# Altium PCB PCB.PcbDoc
Units mm, origin at the board's own origin, x right, y up, seen from the top; angles counter-clockwise.
Board outline 152.4 x 101.6 mm, 2 copper layers (Top Layer, Bottom Layer); 11 components, 16 nets, 60 pads, 3 vias.
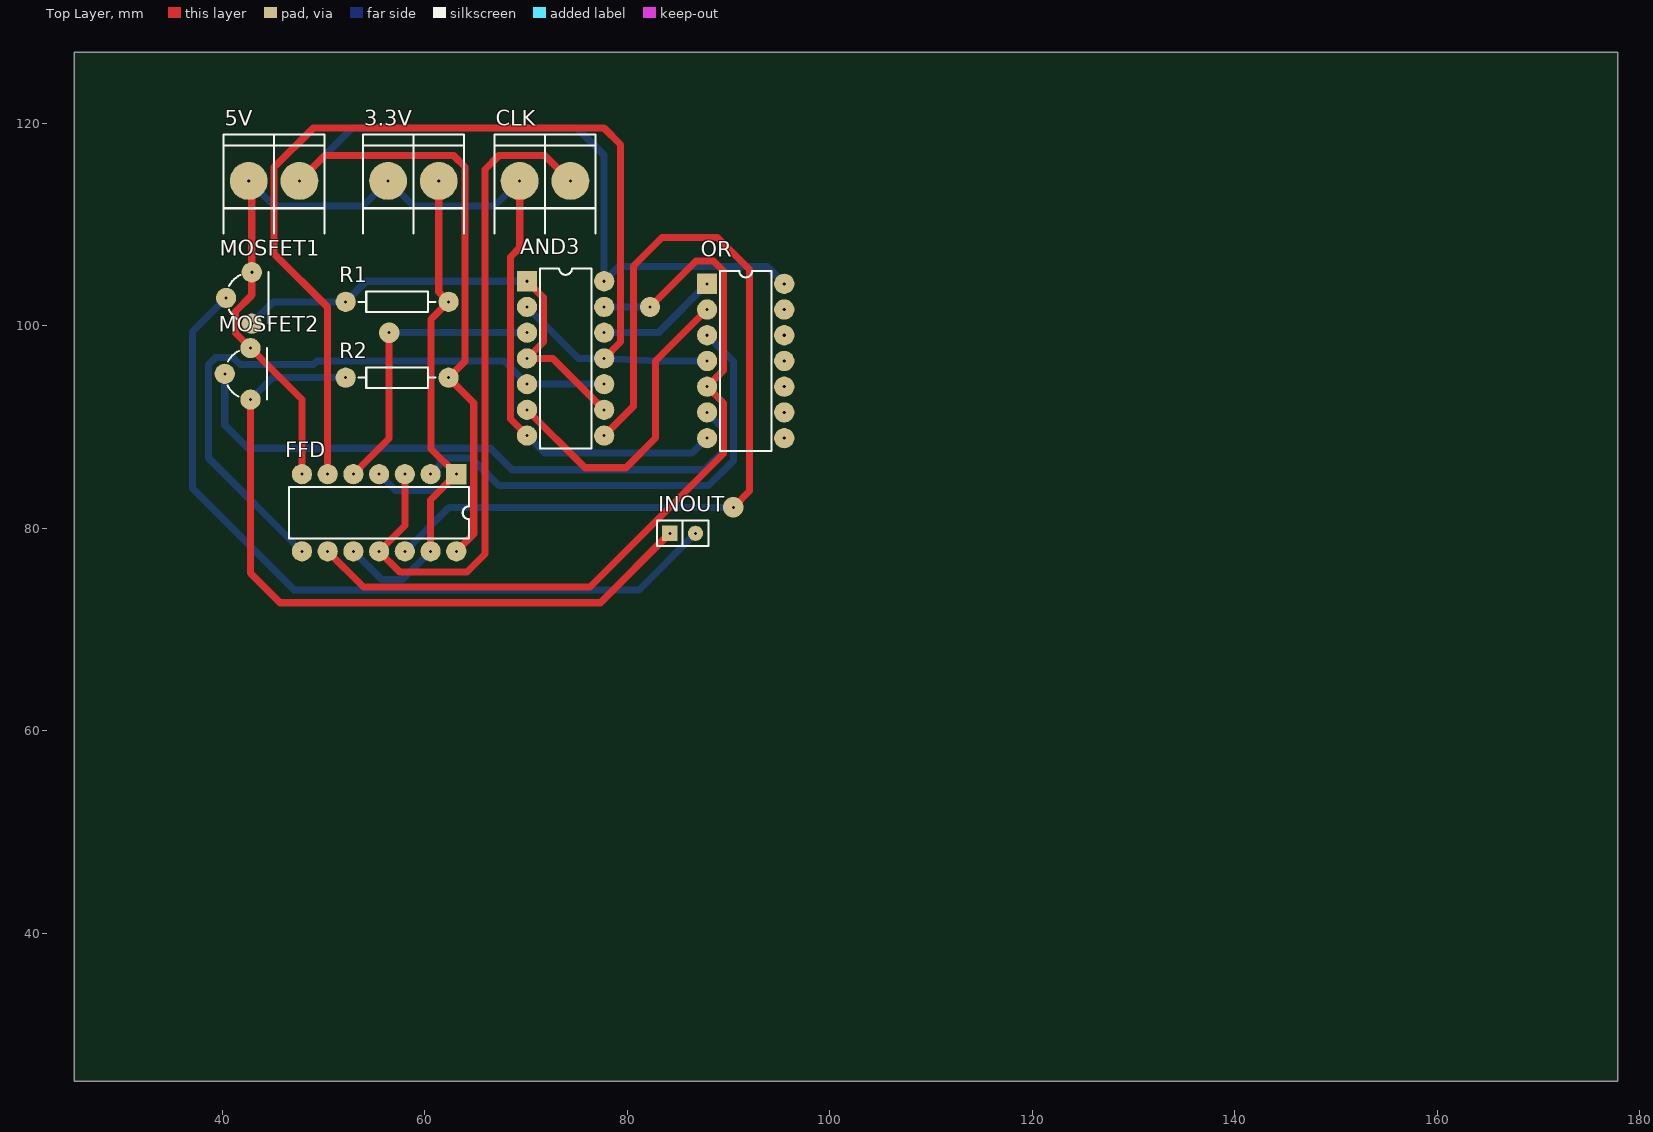
[diagram p0: Top Layer view]
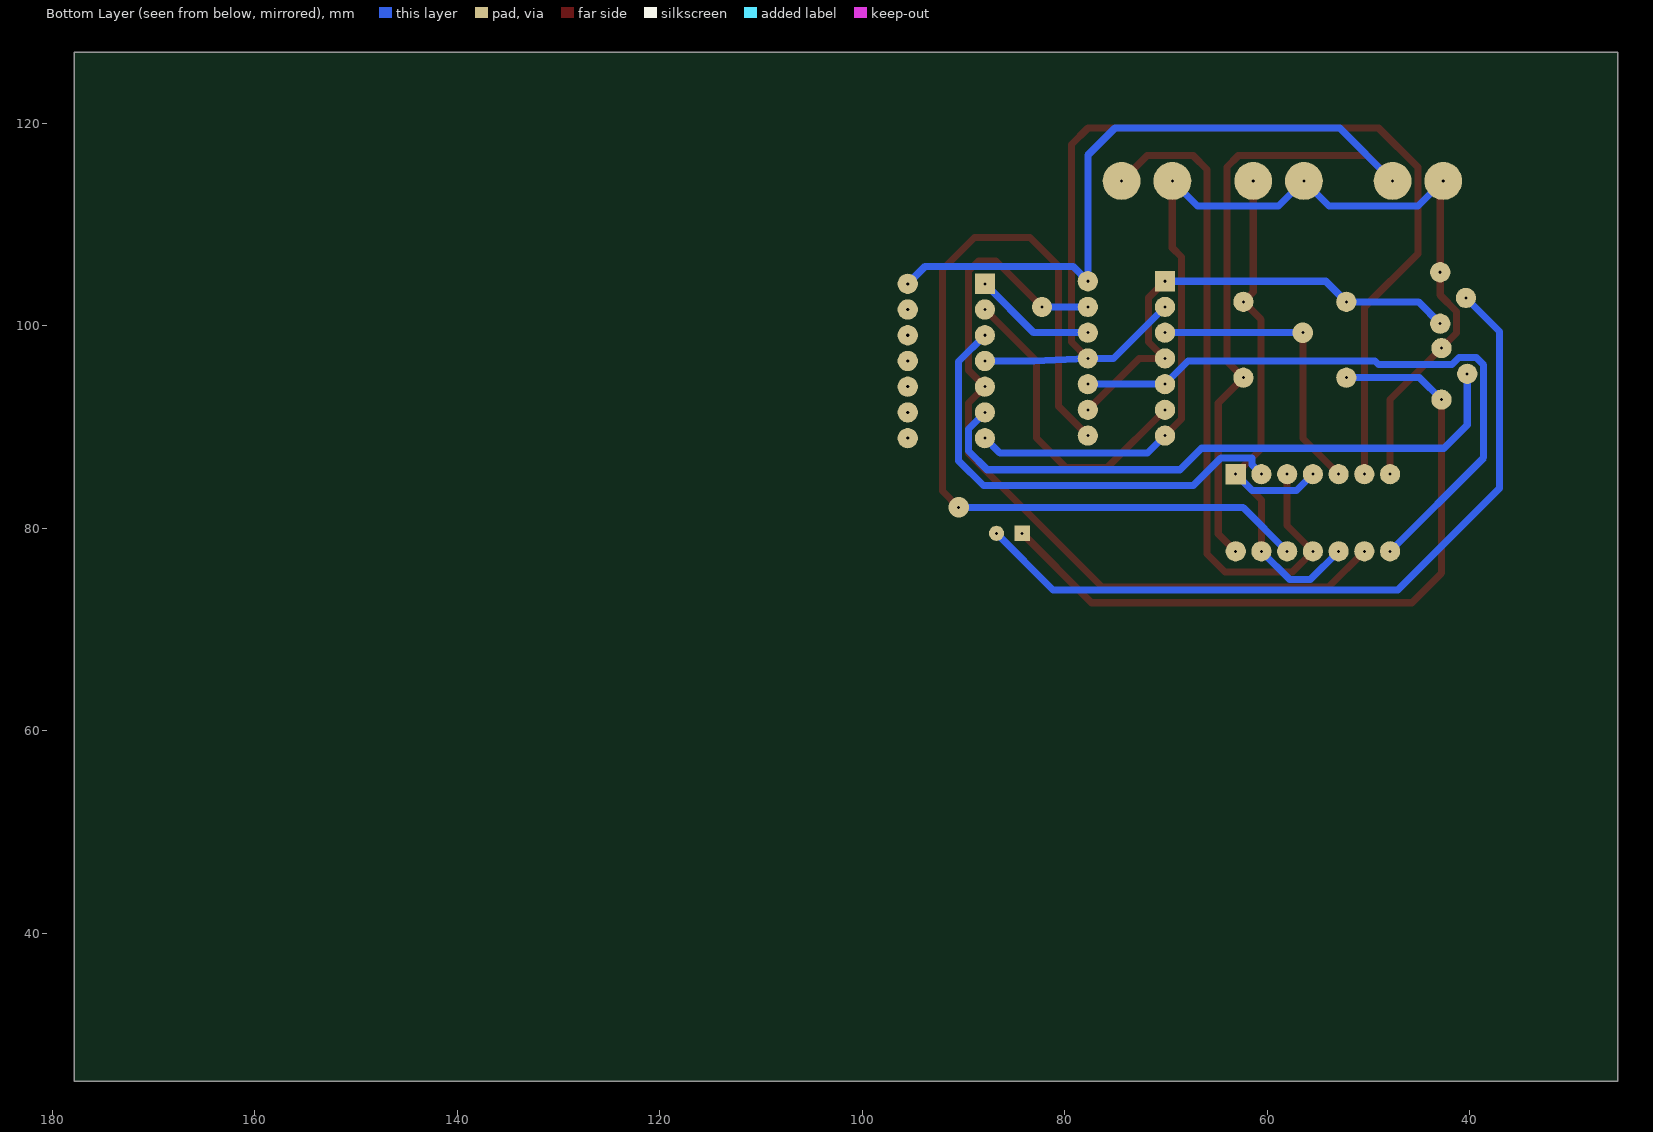
[diagram p1: Bottom Layer view, seen from below]
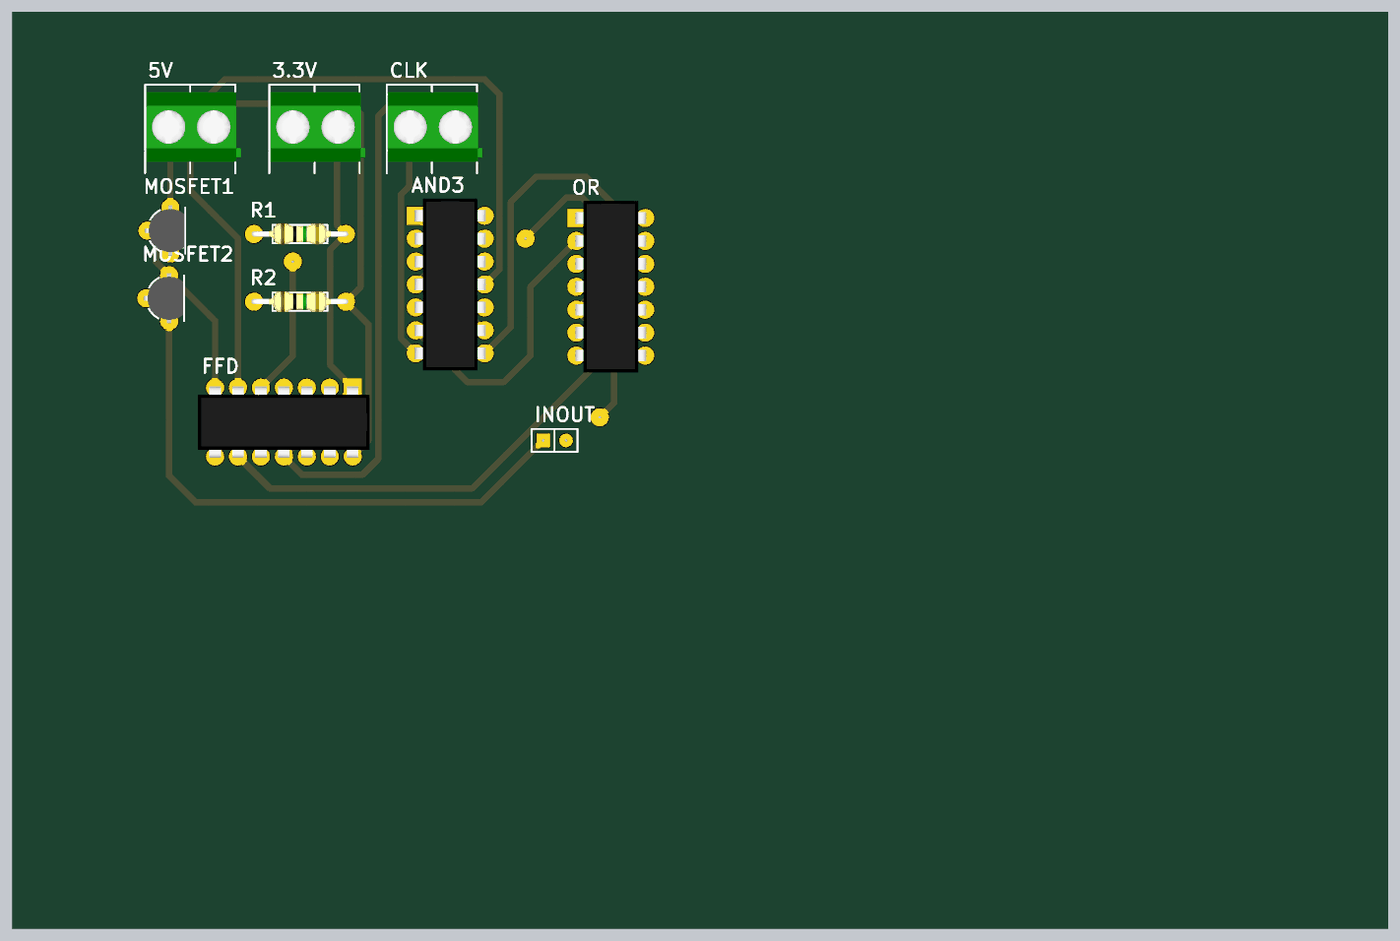
[diagram p2: 3D render of the assembled board from above, using the file's embedded part models]

## Layer stack, top to bottom
Top Solder: solder mask 0.0102, Solder Resist, Dk 3.5
Top Layer: signal copper 0.0356
Dielectric 1: dielectric 0.32, FR-4, Dk 4.8
Bottom Layer: signal copper 0.0356
Bottom Solder: solder mask 0.0102, Solder Resist, Dk 3.5

## Board outline
25.4,25.4 177.8,25.4 177.8,127 25.4,127

## Design rules (kind name [scope] priority, off if disabled: settings)
Clearance [All] p1: gap=0.254 ignorepadtopadclearanceinfootprint=FALSE except(0: Arc-Hole Track-Hole SMDPad-Hole THPad-Hole Via-Hole Fill-Hole Poly-Hole Region-Hole Text-Hole)
PolygonConnect [All] p1: connectstyle=Relief reliefconductorwidth=0.254 reliefentries=4 polygonreliefangle="90 Angle" airgapwidth=0.254
RoutingVias [All] p1: holewidth=0.3 width=2 viastyle="Through Hole" minholewidth=0.3 minwidth=2 maxholewidth=0.3 maxwidth=2
SolderMaskExpansion [All] p1: expansion=0.102
Width [All] p1: maxlimit=0.7 minlimit=0.7 preferedwidth=0.7 minimp=50.000000 maximp=50.000000 favimp=50.000000
30 further rules are at their usual default settings.

## Components (designator, comment, footprint, x,y, rotation, side; value= is the part's Value field where it differs from the comment)
3.3V "BORNERA 2" BORNERA2 58.888,114.3 r270 top
5V "BORNERA 2" BORNERA2 45.125,114.3 r270 top
AND3 "74HC11" DIP14 70.104,104.394 r0 top
CLK "BORNERA 2" BORNERA2 71.882,114.3 r270 top
FFD "74HC74" DIP14 63.119,85.344 r270 top
INOUT "CON2" SIP2 85.471,79.502 r0 top
MOSFET1 "TRANSISTOR PNP" TO92 41.656,102.743 r270 top
MOSFET2 "TRANSISTOR PNP" TO92 41.529,95.25 r270 top
OR "74HC32" DIP14 87.884,104.14 r0 top
R1 "10K" RES400 52.197,102.362 r0 top
R2 "10K" RES400 52.197,94.869 r0 top

## Footprints (in the part's own frame and the unit in brackets; to place one, negate y for a bottom-side part, rotate by r counter-clockwise, add the part's x,y. Pads: shape width x height; smd on the part's side, far side on the other; paste and mask are expansions set on the pad)
BORNERA2 [mm] "Bornera con Tornillos 5mm separación"
  round 3.75 hole 0.3: 1(0,2.5) 2(0,-2.5)
  silkscreen extent -4.6,-5 5.2,5, body extent -3.76,-4.89 3.94,5.61, height 10
DIP14 [mm]
  rect 2x2 hole 0.3: 1(0,0)
  round 2 hole 0.3: 2(0,-2.54) 3(0,-5.08) 4(0,-7.62) 5(0,-10.16) 6(0,-12.7) 7(0,-15.24) 8(7.62,-15.24) 9(7.62,-12.7) 10(7.62,-10.16) 11(7.62,-7.62) 12(7.62,-5.08) 13(7.62,-2.54) 14(7.62,0)
  silkscreen extent 1.27,-16.51 6.35,1.27, body extent -0.13,-17.14 7.75,1.9, height 4.19
RES400 [mm]
  round 2 hole 0.3: 1(0,0) 2(10.16,0)
  silkscreen extent 1.27,-1.02 8.89,1.02, body extent -0.3,-1.14 10.46,1.17, height 2.43
SIP2 [mm]
  rect 1.5x1.5 hole 0.3: 1(-1.27,0)
  round 1.5 hole 0.3: 2(1.27,0)
  silkscreen extent -2.54,-1.27 2.54,1.27
TO92 [mm]
  round 2 hole 0.3: 1(0,-1.27) 2(2.54,1.27) 3(-2.54,1.27)
  silkscreen extent -2.54,-1 2.54,2.92, body extent -2.79,-1.55 2.79,2.79, height 8

## Part data
AND3 FFD OR: library part IC_DIP14
R1 R2: library part RES

## Via types
v1: diameter 2, hole 0.3, Top Layer to Bottom Layer, 3 vias

## Nets (pads, with @x,y where several pads share a name; then routed paths per layer and width w, separated by ;. In a path a pad name is that pad's centre, name@x,y a point inside that pad or via, vN(x,y) a via of type N, cw(c..) or ccw(c..) an arc to the next point about the centre after c; other vN are vias at no path point)
+5: 5V.1 AND3.14 FFD.14 OR.14 R2.2 | length 123.1
  Top Layer w0.7: 5V.1 50.114,116.789 62.865,116.789 63.983,115.672 63.983,96.495 R2.2 64.846,92.38 64.846,79.451 FFD.14
  Bottom Layer w0.7: 5V.1 52.832,119.507 75.057,119.507 77.724,116.84 AND3.14 79.197,105.867 93.777,105.867 OR.14
CLK: CLK.1 FFD.3 FFD.11 | length 68.7
  Top Layer w0.7: FFD.3 58.039,80.264 FFD.11 57.531,75.692 64.186,75.692 65.964,77.47 65.964,115.443 67.31,116.789 71.893,116.789 CLK.1
D1: FFD.2 OR.3 | length 46.6
  Bottom Layer w0.7: FFD.2 61.493,86.258 61.493,86.948 64.588,86.948 67.31,84.226 88.036,84.226 90.475,86.665 90.475,96.469 OR.3
D2: AND3.8 FFD.12 | length 90.2
  Top Layer w0.7: AND3.8 80.62,92.05 80.62,105.893 83.439,108.712 88.9,108.712 92.075,105.537 92.075,83.668 v1(90.475,82.067)
  Bottom Layer w0.7: FFD.12 62.382,82.067 v1(90.475,82.067)
GND: 3.3V.2 5V.2 AND3.7 CLK.2 FFD.7 MOSFET1.3 MOSFET2.3 OR.7 | length 108.6
  Top Layer w0.7: 5V.2 42.926,113.999 MOSFET1.3 42.926,103.015 41.322,101.411 41.322,99.267 MOSFET2.3 47.879,92.71 FFD.7 ; CLK.2 69.382,107.696 68.478,106.792 68.478,90.78 AND3.7
  Bottom Layer w0.7: 5V.2 45.114,111.811 53.899,111.811 3.3V.2 58.877,111.811 66.893,111.811 CLK.2 ; AND3.7 71.831,87.427 86.411,87.427 OR.7
INPUT: INOUT.2 MOSFET1.1 | length 76.3
  Bottom Layer w0.7: MOSFET1.1 37.084,99.441 37.084,83.947 47.117,73.914 81.153,73.914 INOUT.2
O1: AND3.12 OR.1 | length 12.2
  Bottom Layer w0.7: AND3.12 83.058,99.314 OR.1
O2: AND3.6 OR.2 | length 31.1
  Top Layer w0.7: AND3.6 75.819,85.979 79.883,85.979 82.804,88.9 82.804,96.52 OR.2
OUTN: MOSFET2.1 OR.6 | length 61.4
  Bottom Layer w0.7: MOSFET2.1 40.259,90.195 42.552,87.902 66.491,87.902 68.617,85.776 87.655,85.776 89.51,87.63 89.51,89.814 OR.6
OUTPUT: INOUT.1 MOSFET2.2 R2.1 | length 72.9
  Top Layer w0.7: MOSFET2.2 42.799,75.565 45.72,72.644 77.343,72.644 INOUT.1
  Bottom Layer w0.7: MOSFET2.2 44.958,94.869 R2.1
Q1: AND3.3 FFD.5 | length 29
  Top Layer w0.7: FFD.5 56.49,88.875 v1(56.49,99.314)
  Bottom Layer w0.7: v1(56.49,99.314) AND3.3
Q1N: AND3.2 AND3.11 FFD.6 OR.4 | length 110.6
  Top Layer w0.7: FFD.6 50.419,101.829 45.136,107.112 45.136,115.646 48.997,119.507 77.724,119.507 79.35,117.881 79.35,98.4 AND3.11
  Bottom Layer w0.7: AND3.2 75.184,96.774 AND3.11 83.058,96.52 OR.4
Q2: AND3.13 FFD.9 OR.5 | length 79.5
  Top Layer w0.7: FFD.9 53.95,74.193 76.327,74.193 89.51,87.376 89.51,92.354 OR.5 89.51,95.606 89.51,105.41 88.519,106.401 86.792,106.401 v1(82.245,101.854)
  Bottom Layer w0.7: AND3.13 v1(82.245,101.854)
Q2N: AND3.5 AND3.10 FFD.8 | length 63
  Bottom Layer w0.7: FFD.8 38.633,86.97 38.633,96.139 39.37,96.876 41.062,96.876 41.773,96.164 49.022,96.164 49.378,96.52 67.818,96.52 AND3.5 AND3.10
VCC: 3.3V.1 FFD.1 FFD.4 FFD.10 FFD.13 R1.2 | length 58.7
  Top Layer w0.7: FFD.13 60.579,82.804 FFD.1 60.63,87.833 60.63,100.635 R1.2 61.388,103.331 3.3V.1
  Bottom Layer w0.7: FFD.10 55.753,74.93 57.785,74.93 FFD.13 ; FFD.4 57.125,83.718 61.493,83.718 FFD.1
W: AND3.1 AND3.4 AND3.9 MOSFET1.2 R1.1 | length 47.6
  Top Layer w0.7: AND3.1 71.73,102.768 71.73,98.4 AND3.4 72.644,96.774 AND3.9
  Bottom Layer w0.7: MOSFET1.2 45.085,102.362 R1.1 54.229,104.394 AND3.1
pads on no net: OR.8 OR.9 OR.10 OR.11 OR.12 OR.13